# EAGLE board RS323Board (EAGLE 5.10)
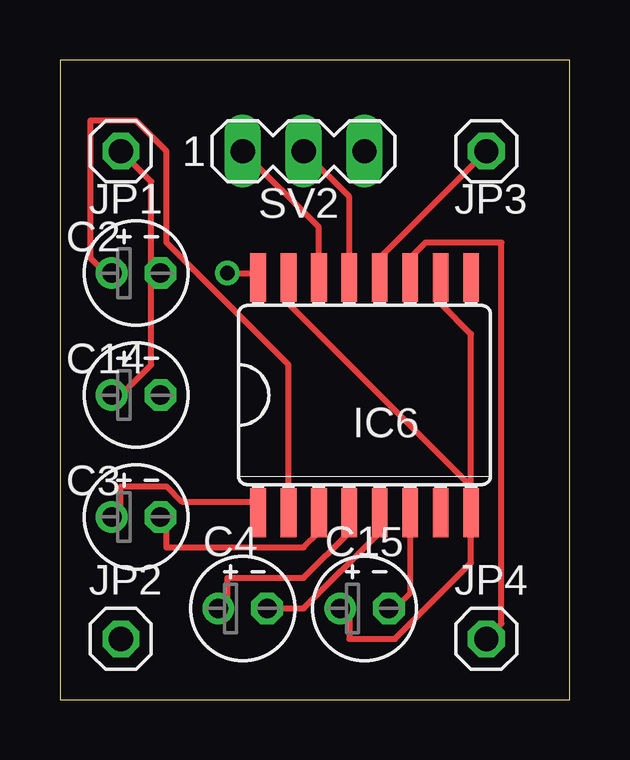
[diagram p0: board, top side]
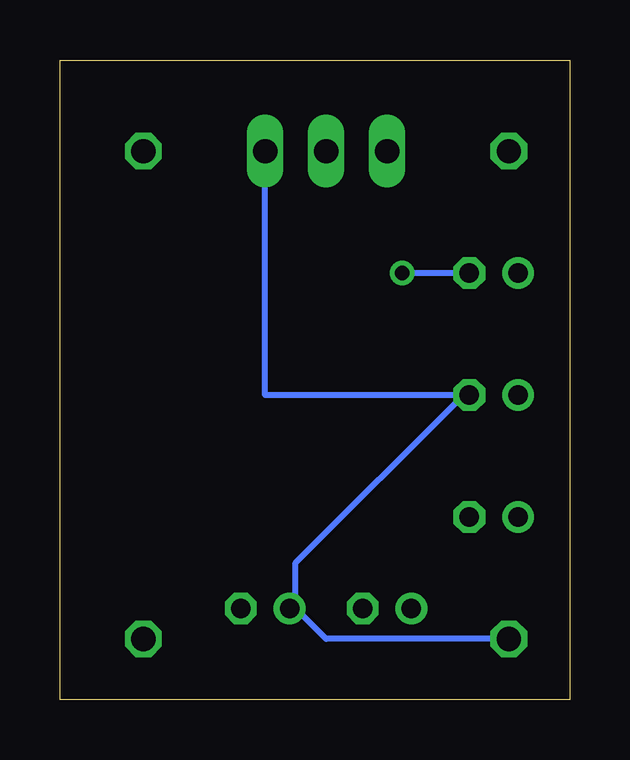
[diagram p1: board, bottom side, seen from below]

Size 21.26 x 26.66 mm. Coordinates in mm from the lower left corner, seen from the top.
Outline: 0,0 21.26,0 21.26,26.66 0,26.66 0,0
Copper layers (1*16): Top 0.035mm / dielectric 1.5mm / Bottom 0.035mm
Design rules "10mils": minimum track width 10mil, minimum drill 24mil, track to track 10mil, track to pad 10mil, pad to pad 10mil, via to via 10mil, smd to smd 10mil, copper to edge 40mil, drill to drill 10mil, minimum pad ring 10mil, minimum via ring 8mil, stop-mask expansion 0mil, vias tented up to drill 0mil, thermal gap 10mil

## Footprints (pad centres in the part's own frame; a part is rotated, then mirrored left to right if it is on the bottom)
E2-4 = drill 0.813 pad 1.27 round: + -1.016,0 | drill 0.813 pad 1.27 octagon: - 1.016,0
SO16L = smd 0.66 x 2.032: 1 -4.445,-4.902; 2 -3.175,-4.902; 3 -1.905,-4.902; 4 -0.635,-4.902; 5 0.635,-4.902; 6 1.905,-4.902; 7 3.175,-4.902; 8 4.445,-4.902; 9 4.445,4.902; 10 3.175,4.902; 11 1.905,4.902; 12 0.635,4.902; 13 -0.635,4.902; 14 -1.905,4.902; 15 -3.175,4.902; 16 -4.445,4.902
1X01 = drill 1.016 octagon: 1 0,0
MA03-1 = drill 1.016 long: 1 -2.54,0; 2 0,0; 3 2.54,0

## Placement (x,y rotation side)
C2  1u  [E2-4]  3.17,17.78 0 top
C3  1u  [E2-4]  3.17,7.62 0 top
C4  1u  [E2-4]  7.62,3.81 0 top
C14  1u  [E2-4]  3.17,12.7 0 top
C15  1u  [E2-4]  12.7,3.81 0 top
IC6  MAX232ECWE  [SO16L]  12.7,12.7 0 top
JP1  +5v  [1X01]  2.54,22.86 0 top
JP2  GND  [1X01]  2.54,2.54 0 top
JP3  RX  [1X01]  17.78,22.86 0 top
JP4  TX  [1X01]  17.78,2.54 0 top
SV2  Serial  [MA03-1]  10.16,22.86 0 top

## Library data of the parts
C2-C4 C14 C15 = rcl
IC6 = maxim
JP1-JP4 = pinhead
SV2 = con-lstb

## Nets
GND: C14.- C15.+ IC6.8 IC6.10 IC6.15 JP2.1 SV2.3
N$1: IC6.11 JP4.1
N$2: IC6.12 JP3.1
N$13: C3.+ IC6.1
N$15: C3.- IC6.3
N$16: IC6.13 SV2.2
N$17: C4.+ IC6.4
N$19: IC6.14 SV2.1
N$42: C15.- IC6.6
N$43: C2.+ IC6.2
N$51: C4.- IC6.5
VCC: C2.- C14.+ IC6.16 JP1.1

## Tracks (layer width: path | path; a pad name or v marks a point on that pad's centre or on a via)
GND
  Top 0.254: 17.14,8.89 17.14,15.24 15.88,16.51 IC6.10 | 17.14,8.89 IC6.8 17.14,5.71 13.97,2.54 12.06,2.54 12.06,3.81 C15.+ | 17.14,8.89 9.53,16.51 IC6.15
  Bottom 0.254: 11.43,3.81 10.16,2.54 JP2.1 | 4.45,12.7 11.43,5.71 11.43,3.81 | 11.43,3.81 C15.+ | SV2.3 12.7,12.7 4.45,12.7 | 4.45,12.7 C14.-
N$1
  Top 0.254: JP4.1 18.41,3.17 18.41,19.05 15.24,19.05 14.61,18.41 IC6.11
N$2
  Top 0.254: JP3.1 13.34,18.41 IC6.12
N$13
  Top 0.254: IC6.1 8.26,8.26 5.08,8.26 4.45,8.89 2.54,8.89 2.54,7.62 C3.+
N$15
  Top 0.254: IC6.3 10.79,6.99 10.16,6.35 4.45,6.35 4.45,7.62 C3.-
N$16
  Top 0.254: SV2.2 12.06,20.95 IC6.13
N$17
  Top 0.254: IC6.4 12.06,6.99 10.16,5.08 6.99,5.08 6.99,3.81 C4.+
N$19
  Top 0.254: SV2.1 10.79,19.68 IC6.14
N$42
  Top 0.254: IC6.6 14.61,4.45 13.97,3.81 C15.-
N$43
  Top 0.254: IC6.2 9.53,13.97 4.45,19.05 4.45,22.86 3.17,24.13 1.27,24.13 1.27,18.41 1.91,17.78 C2.+
N$51
  Top 0.254: IC6.5 13.34,6.99 10.16,3.81 C4.-
VCC  (via drill 0.61)
  Top 0.254: v6.99,17.78 8.26,17.78 IC6.16 | 3.81,17.78 3.81,13.97 2.54,12.7 C14.+ | JP1.1 3.81,21.59 3.81,17.78 | 3.81,17.78 C2.-
  Bottom 0.254: C2.- v6.99,17.78